# Altium PCB PCB.PcbDoc (part 2 of 2)
Units mm, origin at the board's own origin, x right, y up, seen from the top; angles counter-clockwise.
Board outline 125 x 105 mm, 2 copper layers (Top Layer, Bottom Layer), stack 1.571 mm thick; 113 components, 99 nets, 408 pads, 143 vias.
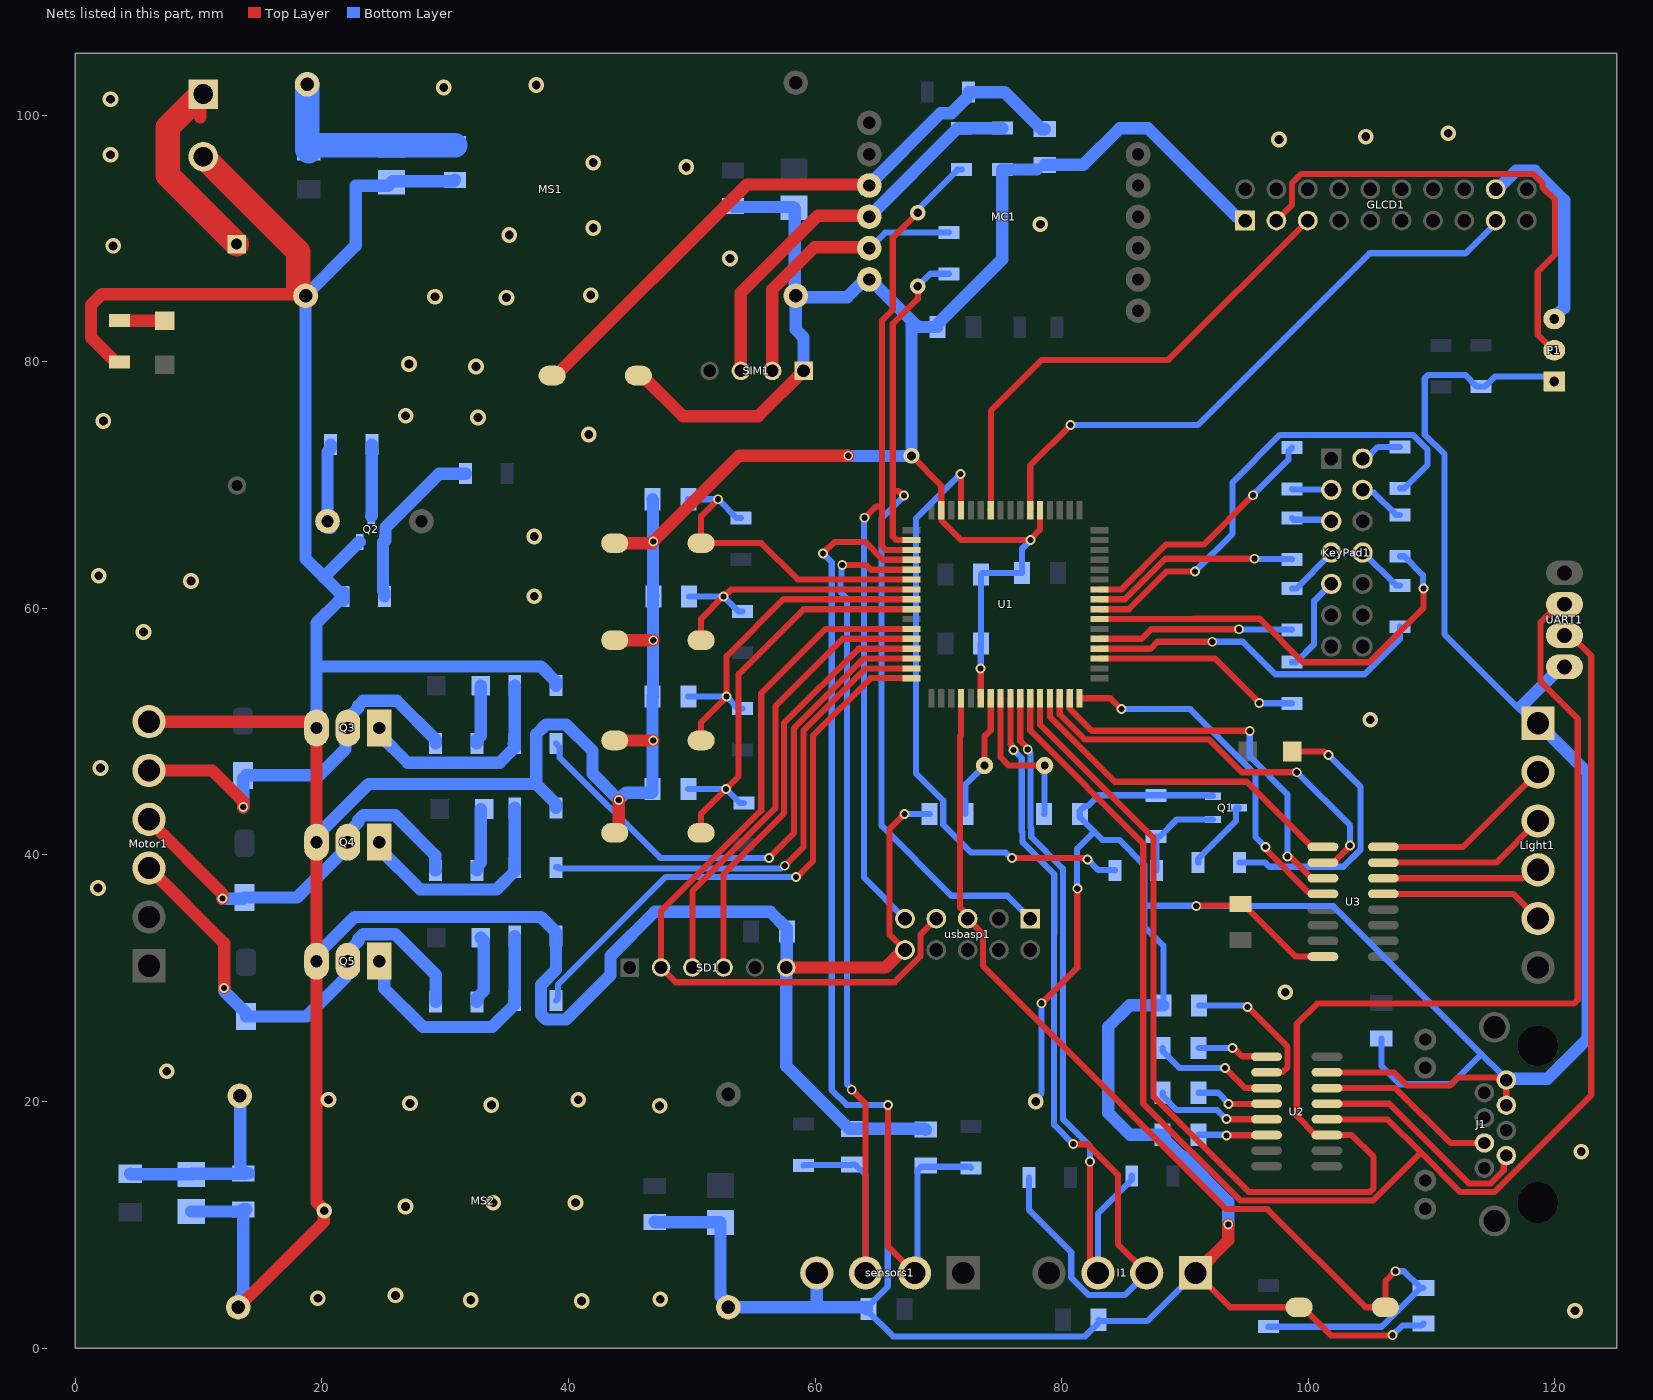
[diagram p2: the nets of this part, all layers, seen from the top]

## Via types
v1: diameter 0.8, hole 0.5, Top Layer to Bottom Layer, 76 vias
v2: diameter 1.27, hole 0.711, Top Layer to Bottom Layer, 63 vias
v3: diameter 7, hole 4, Top Layer to Bottom Layer, 4 vias

## Nets (pads, with @x,y where several pads share a name; then routed paths per layer and width w, separated by ;. In a path a pad name is that pad's centre, name@x,y a point inside that pad or via, vN(x,y) a via of type N, cw(c..) or ccw(c..) an arc to the next point about the centre after c; other vN are vias at no path point) (continued)
GND: C1.2 C2.2 C3.2 C4.2 C5.2 C6.2 C7.2 C8.2 C9.2 C10.2 C11.2 C12.2 C13.2 C14.2 C15.2 C16.2 C17.2 C18.2 C19.2 C20.2 C22.2 C24.2 C25.2 C26.2 C27.2 C28.2 C29.2 C30.1 C31.1 GLCD1.1 I1.1 J1.1 J1.3 Light1.1 MC1.6 Motor1.6 MS1.2 MS1.3 MS2.2 MS2.3 P1.1 Power1.2 Q1.2 Q2.2 Q3.3 Q4.3 Q5.3 R8.1 R9.1 R10.1 R14.1 R19.1 R20.1 R22.1 R25.2 Reset1.1 S1.2 S2.1 S3.1 S4.1 S5.1 SD1.6 sensors1.4 SIM1.1 U1.22 U1.53 U1.63 U2.15 U3.8 UART1.4 usbasp1.10 | length 870
  Top Layer w0.5: v1(67.234,43.307) 66.035,42.108 66.035,33.533 usbasp1.10@67.285,32.283 ; v2(67.818,72.353) 70.231,69.94 U1.63@70.231,67.945 70.235,67.941 70.235,67.127 71.83,65.532 v1(77.47,65.532) 77.47,65.613 78.232,66.375 U1.53@78.232,67.945 ; v1(73.406,55.118) 73.427,55.097 73.427,52.709 U1.22@73.431,52.705 ; v1@78.384,27.965 81.261,30.842 v1(81.261,37.255) ; I1.1@90.851,6.096 93.645,3.302 Reset1.1@99.243,3.302 99.543,3.302 101.829,1.016 v1@106.807,1.016 ; v1(90.907,35.839) 90.964,35.897 94.391,35.897 C31.1@94.488,35.994 ; C31.1@94.738,35.994 98.982,31.75 U3.8@101.182,31.75 ; U2.15@101.51,22.352 106.934,22.352 108.001,21.285 111.47,21.285 112.131,21.946 114.787,21.946 114.798,21.935 115.848,21.935 J1.1@116.054,21.729 J1.3@116.054,19.689
  Top Layer w1: R10.1@3.567,79.973 3.242,79.973 1.27,81.945 1.27,84.582 2.159,85.471 18.542,85.471 MS1.2@18.669,85.344 ; Motor1.6@5.969,50.8 19.096,50.8 19.558,50.338 Q3.3@19.558,50.292 Q4.3@19.558,41.021 Q5.3@19.558,31.369 19.558,11.833 20.193,11.198 v2(20.193,11.125) 20.141,11.074 20.141,10.235 MS2.2@13.208,3.302 ; S2.1@43.688,65.334 S2.1@43.744,65.278 46.736,65.278 v1(46.863,65.405) 53.823,72.365 v1(62.687,72.365) ; S5.1@43.744,41.783 43.792,41.783 44.069,42.06 v1(44.069,44.45) ; S4.1@43.744,49.276 v1(46.863,49.276) ; S3.1@43.744,57.404 v1(46.863,57.404) ; S1.2@45.664,78.867 45.964,78.867 49.266,75.565 55.372,75.565 SIM1.1@59.055,79.248 ; SD1.6@57.658,30.861 65.7,30.861 67.122,32.283 usbasp1.10@67.285,32.283 ; I1.1@90.851,6.096 93.497,8.742 v1(93.497,10.008)
  Top Layer w2: Power1.2@10.375,96.622 18.085,88.912 18.085,85.928 MS1.2@18.669,85.344
  Bottom Layer w0.5: C13.2@9.398,11.073 C13.2@9.575,11.25 ; 65.837,17.78 65.889,17.728 65.889,4.978 64.186,3.275 64.186,3.075 66.325,0.936 81.884,0.936 82.984,2.036 C5.2@82.984,2.286 83.092,2.178 86.933,2.178 I1.1@90.851,6.096 ; v1(67.234,43.307) C7.2@69.289,43.307 ; v1(73.406,55.118) 73.432,55.144 73.432,57.124 C2.2@73.459,57.15 C1.2@73.459,62.738 73.586,62.865 C3.2@76.782,62.865 76.782,64.844 v1(77.47,65.532) ; v2(77.886,19.992) 77.886,20.2 78.359,20.673 v1(78.359,27.965) ; v1@81.28,37.236 v1(81.261,37.255) 81.243,37.274 81.243,40.501 82.629,41.888 ; C6.2@81.46,43.307 81.46,43.057 82.629,41.888 ; C6.2@81.46,43.557 81.86,43.957 82.11,43.957 82.98,44.827 R8.1@87.63,44.827 91.849,44.827 91.911,44.765 Q1.2@92.261,44.765 ; C22.2@88.237,27.788 88.237,32.637 86.703,34.172 86.703,35.865 ; C24.2@105.918,25.093 105.918,22.885 107.413,21.39 111.575,21.39 114.01,23.825 114.039,23.825 ; v1@106.807,1.016 106.816,1.016 107.625,1.825 109.193,1.825 C8.2@109.347,1.979 ; J1.1@115.558,22.225 J1.1@116.054,21.729 ; J1.1@115.599,22.266 114.039,23.825 ; Light1.1@117.518,51.767 117.144,51.767 111.05,57.861 111.05,72.47 109.444,74.076 109.444,78.663 109.708,78.926 112.722,78.926 113.67,77.978 R25.2@113.995,77.978 114.32,77.978 115.133,78.791 119.532,78.791 P1.1@119.939,78.384 ; 82.629,41.888 83.303,41.214 84.643,41.214 86.703,39.154 86.703,35.865 ; 86.703,35.865 90.881,35.865 v1(90.907,35.839) 102.025,35.839 114.039,23.825
  Bottom Layer w1: C13.2@9.398,11.073 C16.2@13.614,11.073 ; MS2.2@13.208,3.302 13.399,3.493 13.399,4.173 13.614,4.388 C16.2@13.614,11.073 ; C16.2@13.614,11.25 C16.2@13.614,11.073 ; C16.2@13.847,11.25 13.67,11.073 C16.2@13.614,11.073 ; Q5.3@19.558,31.369 19.558,31.869 22.64,34.951 37.76,34.951 38.985,33.726 R22.1@38.985,33.401 38.985,30.678 37.76,29.453 37.76,27.054 38.17,26.644 39.8,26.644 43.395,30.239 43.395,31.787 46.989,35.382 56.361,35.382 57.685,34.058 57.685,30.887 SD1.6@57.658,30.861 57.658,22.864 62.742,17.78 65.837,17.78 68.887,17.78 C19.2@68.961,17.706 ; Q4.3@19.558,41.021 19.558,41.521 23.783,45.746 37.379,45.746 ; Q3.3@19.558,50.292 19.558,55.271 ; Q2.2@23.053,65.371 23.003,65.371 20.157,62.525 ; C12.2@30.785,94.74 30.683,94.638 25.73,94.638 C9.2@25.629,94.536 25.348,94.255 22.733,94.255 22.733,89.408 MS1.2@18.669,85.344 18.669,64.012 20.157,62.524 ; R20.1@38.985,43.815 38.985,44.14 37.379,45.746 ; R19.1@38.985,53.721 38.96,53.746 38.96,54.071 37.76,55.271 19.558,55.271 ; C26.2@46.81,68.834 46.847,68.797 46.847,60.997 C27.2@46.884,60.96 46.847,60.923 46.847,52.869 C28.2@46.81,52.832 C29.2@46.81,45.339 46.81,45.089 46.762,45.041 44.66,45.041 v1(44.069,44.45) 41.934,46.585 41.934,48.437 39.8,50.572 38.17,50.572 37.379,49.781 37.379,45.746 ; C15.2@46.99,10.234 47.015,10.209 52.299,10.209 C14.2@52.324,10.184 52.324,4.208 52.959,3.573 MS2.3@52.959,3.302 60.129,3.302 ; C11.2@53.34,92.604 53.402,92.542 58.231,92.542 C10.2@58.293,92.48 58.357,92.416 58.357,85.407 MS1.3@58.42,85.344 ; SIM1.1@59.055,79.248 59.055,81.968 58.42,82.603 MS1.3@58.42,85.344 ; sensors1.4@60.129,6.096 60.129,3.447 60.274,3.302 64.186,3.302 C18.2@64.186,3.152 ; v1(62.687,72.365) 62.699,72.353 v2(67.818,72.353) 67.818,83.312 ; C17.2@77.987,95.583 R14.1@75.184,95.583 75.184,88.314 69.924,83.054 C4.2@69.924,82.804 68.326,82.804 67.818,83.312 ; C17.2@78.613,95.959 81.735,95.959 84.709,98.933 86.995,98.933 94.188,91.74 94.569,91.74 GLCD1.1@94.869,91.44 ; C22.2@88.237,27.788 85.496,27.788 83.769,26.06 83.769,19.055 85.527,17.297 C25.2@88.187,17.297 88.337,17.147 88.337,16.897 89.714,15.52 89.842,15.52 93.497,11.865 v1(93.497,10.008) ; J1.1@116.054,21.729 116.164,21.839 116.57,21.839 116.575,21.844 119.394,21.844 122.657,25.107 122.657,46.628 Light1.1@118.618,50.667 117.267,52.018 120.495,55.245 UART1.4@120.777,55.245 ; 19.558,55.271 19.558,58.797 21.371,60.61 21.696,60.61 21.721,60.635 R9.1@21.721,60.96 21.721,61.285 21.696,61.31 21.371,61.31 20.157,62.524 ; MS1.3@58.42,85.344 58.547,85.217 62.594,85.217 64.118,86.741 64.389,86.741 67.818,83.312
  other v1: 106.832,1.041
  other v2: 121.625,3.025 41.056,3.812 32.064,3.888 47.431,3.965 19.669,4.041 25.968,4.269 26.772,11.481 33.884,11.786 40.564,11.786 122.133,15.928 47.381,19.636 33.741,19.713 27.137,19.84 20.533,20.144 40.777,20.144 7.401,22.456 98.12,28.854 1.838,37.315 2.042,47.043 105.013,50.955 5.521,58.067 37.221,60.962 9.382,62.207 1.889,62.639 37.221,65.814 41.64,74.094 2.27,75.186 32.649,75.466 26.781,75.618 32.496,79.606 27.061,79.809 34.96,85.194 29.169,85.27 41.793,85.397 53.096,88.369 3.058,89.385 35.189,90.274 41.996,90.833 78.267,91.137 49.54,95.786 41.996,96.141 2.854,96.776 97.622,98.021 104.658,98.249 111.338,98.529 2.854,101.272 29.88,102.237 37.373,102.44
IR_receive: C19.1 R27.1 sensors1.2 U1.4 | length 84.5
  Top Layer w0.5: v1(60.63,64.44) 61.57,65.38 64.051,65.38 65.499,63.932 U1.4@67.818,63.932 ; v1(65.913,19.71) 65.913,8.232 sensors1.2@68.049,6.096
  Bottom Layer w0.5: v1(60.63,64.44) 61.341,63.729 61.341,20.913 62.544,19.71 v1(65.913,19.71) ; sensors1.2@68.049,6.096 68.311,6.358 68.311,14.406 68.613,14.708 72.546,14.708 R27.1@72.644,14.609
IR_send: C20.1 R26.2 sensors1.3 U1.5 | length 77.5
  Top Layer w0.5: v1(62.191,63.5) 64.138,63.5 64.519,63.119 U1.5@67.818,63.119 ; v1(62.967,20.947) 64.089,19.825 sensors1.3@64.089,6.096
  Bottom Layer w0.5: R26.2@59.055,14.807 59.091,14.844 62.955,14.844 C20.1@62.992,14.88 63.242,14.88 64.089,14.033 sensors1.3@64.089,6.096 ; v1(62.191,63.5) 62.134,63.443 62.134,62.361 62.041,62.269 62.041,61.327 62.586,60.782 62.586,21.39 62.967,21.009 v1(62.967,20.947)
Light-1: U1.29 U3.1 | length 28
  Top Layer w0.5: U1.29@79.045,52.705 79.045,51.182 84.297,45.93 94.992,45.93 100.282,40.64 U3.1@101.182,40.64
Light-2: U1.30 U3.2 | length 33
  Top Layer w0.5: U1.30@79.832,52.705 79.832,51.385 81.853,49.364 91.937,49.364 94.604,46.697 v1(99.06,46.697) ; U3.2@101.182,39.37 102.031,39.37 103.378,40.717 v1(103.378,40.767)
  Bottom Layer w0.5: v1(99.06,46.697) 103.378,42.379 v1(103.378,40.767)
Light-3: U1.31 U3.3 | length 31.2
  Top Layer w0.5: U1.31@80.645,52.705 80.649,52.701 80.649,51.861 82.446,50.064 95.224,50.064 v1(95.25,50.038) ; v1(98.298,39.878) 98.355,39.821 98.561,39.821 100.282,38.1 U3.3@101.182,38.1
  Bottom Layer w0.5: v1(95.25,50.038) 95.25,47.98 98.298,44.932 v1(98.298,39.878)
Light-4: U1.32 U3.4 | length 29.4
  Top Layer w0.5: U1.32@81.432,52.705 83.947,52.705 v1(84.836,51.816) ; v1(96.52,40.64) 96.577,40.583 96.577,40.397 100.044,36.93 100.128,36.93 100.228,36.83 U3.4@101.182,36.83
  Bottom Layer w0.5: v1(84.836,51.816) 90.424,51.816 95.702,46.538 95.702,41.458 v1(96.52,40.64)
light-o-1: Light1.2 U3.16 | length 15
  Top Layer w0.5: U3.16@106.082,40.64 112.551,40.64 Light1.2@118.618,46.707
light-o-2: Light1.3 U3.15 | length 14.5
  Top Layer w0.5: U3.15@106.082,39.37 115.241,39.37 Light1.3@118.618,42.747 Light1.3@118.084,42.747
light-o-3: Light1.4 U3.14 | length 12.8
  Top Layer w0.5: U3.14@106.082,38.1 117.336,38.1 118.023,38.787 Light1.4@118.618,38.787
light-o-4: Light1.5 U3.13 | length 13.4
  Top Layer w0.5: U3.13@106.082,36.83 116.615,36.83 Light1.5@118.618,34.827
MISO: SD1.4 U1.13 | length 34.7
  Top Layer w0.5: SD1.4@52.578,30.861 52.578,38.457 57.469,43.348 57.469,50.673 63.514,56.718 U1.13@67.818,56.718
MOSI: SD1.3 U1.12 | length 37.3
  Top Layer w0.5: SD1.3@50.038,30.861 50.038,37.029 56.769,43.76 56.769,52.07 62.23,57.531 U1.12@67.818,57.531
motor_1: D3.1 Motor1.5 Q3.2 R15.1 | length 32.8
  Top Layer w1: Motor1.5@5.969,46.84 11.097,46.84 13.614,44.323 v1(13.614,43.866)
  Bottom Layer w1: v1(13.614,43.866) 13.614,46.202 13.854,46.441 19.771,46.441 21.907,48.577 21.907,50.101 Q3.2@22.098,50.292 22.098,51.063 22.938,51.903 22.938,52.082 23.348,52.492 26.069,52.492 29.214,49.347 R15.1@29.214,49.022
motor_2: D2.1 Motor1.4 Q4.2 R16.1 | length 32.3
  Top Layer w1: Motor1.4@5.969,42.88 5.969,42.799 11.938,36.83 v1(11.938,36.449)
  Bottom Layer w1: v1(11.938,36.449) 13.63,36.449 D2.1@13.716,36.535 17.976,36.535 22.098,40.657 22.098,41.792 22.938,42.632 22.938,42.811 23.348,43.221 25.928,43.221 29.189,39.96 29.189,38.76 R16.1@29.214,38.735
motor_3: D4.1 Motor1.3 Q5.2 R17.1 | length 38.2
  Top Layer w1: Motor1.3@5.969,38.92 12.065,32.824 v1(12.065,29.21)
  Bottom Layer w1: v1(12.065,29.21) 12.065,28.961 13.843,27.183 D4.1@13.843,26.883 18.755,26.883 21.907,30.035 21.907,31.178 Q5.2@22.098,31.369 22.098,32.14 22.938,32.98 22.938,33.159 23.348,33.569 25.928,33.569 29.214,30.283 R17.1@29.214,28.067
motor_con_1: R18.2 U1.14 | length 44.8
  Top Layer w0.5: v1(56.261,39.751) 58.293,41.783 58.293,50.292 63.932,55.931 U1.14@67.818,55.931
  Bottom Layer w0.5: R18.2@38.985,49.022 39.26,48.747 39.26,47.915 47.424,39.751 v1(56.261,39.751)
motor_con_2: R21.2 U1.15 | length 41.1
  Top Layer w0.5: v1(57.531,39.116) 59.042,40.627 59.042,50.051 64.109,55.118 U1.15@67.818,55.118
  Bottom Layer w0.5: R21.2@38.985,38.989 39.172,38.989 39.26,38.901 57.235,38.901 57.45,39.116 v1(57.531,39.116)
motor_con_3: R23.2 U1.16 | length 46.3
  Top Layer w0.5: v1(58.434,38.201) 58.515,38.201 59.107,38.794 59.114,38.794 59.817,39.497 59.817,49.657 64.491,54.331 U1.16@67.818,54.331
  Bottom Layer w0.5: R23.2@38.985,28.194 39.133,28.342 39.133,29.481 47.853,38.201 v1(58.434,38.201)
NetC9_1: C9.1 C12.1 F1.2 MS1.1 | length 17.5
  Bottom Layer w2: MS1.1@18.796,102.489 18.796,97.19 F1.2@18.923,97.063 19.396,97.536 C9.1@25.629,97.536 C12.1@30.785,97.536
NetC13_1: C13.1 C16.1 F3.2 MS2.1 | length 15.2
  Bottom Layer w1: F3.2@4.445,14.123 4.47,14.098 9.373,14.098 C13.1@9.398,14.073 ; C13.1@9.465,14.14 C16.1@13.735,14.14 ; 13.373,14.915 MS2.1@13.373,20.409 ; C16.1@13.697,14.3 13.818,14.179 C16.1@14.068,14.179
NetC17_1: C17.1 MC1.3 R11.1 S1.1 | length 51
  Top Layer w1: S1.1@38.664,78.867 38.964,78.867 54.458,94.361 MC1.3@64.389,94.361
  Bottom Layer w1: MC1.3@64.351,94.323 70.182,100.154 71.063,100.154 72.438,101.529 R11.1@72.438,101.854 75.368,101.854 78.363,98.859 C17.1@78.613,98.859
NetC21_1: C21.1 U2.1 | length 5.8
  Top Layer w0.5: v1(93.853,24.333) 93.934,24.333 94.61,23.657 96.575,23.657 U2.1@96.61,23.622
  Bottom Layer w0.5: C21.1@91.087,24.333 v1(93.853,24.333)
NetC21_2: C21.2 U2.3 | length 9.9
  Top Layer w0.5: v1(93.243,22.708) 94.869,21.082 U2.3@96.61,21.082
  Bottom Layer w0.5: C21.2@88.187,24.333 88.187,24.083 89.562,22.708 v1(93.243,22.708)
NetC22_1: C22.1 U2.2 | length 12.1
  Top Layer w0.5: v1(95.072,27.661) 98.31,24.423 98.31,22.77 97.93,22.39 96.648,22.39 U2.2@96.61,22.352
  Bottom Layer w0.5: C22.1@91.137,27.788 94.864,27.788 94.991,27.661 v1(95.072,27.661)
NetC23_1: C23.1 U2.4 | length 6
  Top Layer w0.5: v1(93.523,19.787) 93.535,19.799 96.597,19.799 U2.4@96.61,19.812
  Bottom Layer w0.5: C23.1@91.087,20.701 92.685,20.701 v1@93.599,19.787
NetC23_2: C23.2 U2.5 | length 9.4
  Top Layer w0.5: v1(93.37,18.567) 93.383,18.555 96.597,18.555 U2.5@96.61,18.542
  Bottom Layer w0.5: C23.2@88.187,20.701 88.187,20.451 89.341,19.296 92.591,19.296 v1@93.345,18.542
NetC25_1: C25.1 U2.6 | length 5.6
  Top Layer w0.5: v1(93.37,17.247) 93.383,17.259 96.597,17.259 U2.6@96.61,17.272
  Bottom Layer w0.5: C25.1@91.087,17.297 93.396,17.297 v1@93.421,17.272
NetD1_2: D1.2 R10.2 | length 3.7
  Top Layer w1: R10.2@3.556,83.312 R10.2@3.567,83.323 7.228,83.323 D1.2@7.239,83.334
NetD5_2: D5.2 R15.2 | length 4.8
  Bottom Layer w1: R15.2@32.564,49.022 32.564,49.347 32.884,49.667 D5.2@32.884,53.721
NetD6_2: D6.2 R16.2 | length 5.1
  Bottom Layer w1: R16.2@32.564,38.735 32.564,39.06 32.884,39.38 D6.2@32.884,43.688
NetD7_2: D7.2 R17.2 | length 5.5
  Bottom Layer w1: R17.2@32.564,28.067 32.564,28.392 33.122,28.95 33.122,33.036 D7.2@32.884,33.274
NetF2_1: F2.1 Power1.1 | length 17.7
  Top Layer w1: 10.135,99.797 10.135,101.461 Power1.1@10.375,101.702
  Top Layer w2: Power1.1@10.287,101.79 7.493,98.997 7.493,95.123 F2.1@13.081,89.535
NetGLCD1_3: GLCD1.3 P1.2 | length 39.7
  Top Layer w0.5: GLCD1.3@97.409,91.44 98.659,92.69 98.659,94.458 99.431,95.23 118.247,95.23 118.979,94.498 118.979,94.144 120.005,93.118 120.005,88.694 118.6,87.289 118.6,82.2 119.875,80.924 P1.2@119.939,80.924
NetJ1_6: J1.6 U2.14 | length 14.6
  Top Layer w0.5: U2.14@101.51,21.082 107.061,21.082 111.514,16.629 J1.6@114.274,16.629
NetJ1_7: J1.7 U2.13 | length 18.7
  Top Layer w0.5: U2.13@101.51,19.812 106.553,19.812 113.013,13.352 114.787,13.352 115.848,14.413 115.848,15.403 J1.7@116.054,15.609
NetKeyPad1_2: KeyPad1.2 R32.2 | length 3.4
  Bottom Layer w0.5: KeyPad1.2@104.394,72.136 104.705,72.136 105.646,73.077 R32.2@107.442,73.077
NetKeyPad1_3: KeyPad1.3 R33.1 | length 3.2
  Bottom Layer w0.5: R33.1@98.679,69.675 98.718,69.636 101.815,69.636 KeyPad1.3@101.854,69.596
NetKeyPad1_4: KeyPad1.4 R34.2 | length 3.9
  Bottom Layer w0.5: KeyPad1.4@104.394,69.596 104.614,69.376 105.305,69.376 107.117,67.564 R34.2@107.442,67.564
NetKeyPad1_5: KeyPad1.5 R35.1 | length 3.3
  Bottom Layer w0.5: R35.1@98.679,67.306 98.804,67.181 101.729,67.181 KeyPad1.5@101.854,67.056
NetKeyPad1_7: KeyPad1.7 R36.1 | length 4.4
  Bottom Layer w0.5: R36.1@98.679,61.591 99.004,61.591 101.854,64.441 KeyPad1.7@101.854,64.516
NetKeyPad1_8: KeyPad1.8 R37.2 | length 4.2
  Bottom Layer w0.5: KeyPad1.8@104.394,64.516 104.45,64.516 107.117,61.849 R37.2@107.442,61.849
NetKeyPad1_9: KeyPad1.9 R38.1 | length 7.9
  Bottom Layer w0.5: R38.1@98.679,55.622 99.004,55.622 100.456,57.074 100.456,60.578 KeyPad1.9@101.854,61.976
NetLS1_2: LS1.2 R5.1 | length 7
  Bottom Layer w1: LS1.2@20.705,66.527 20.447,66.785 LS1.2@20.447,67.056 20.447,72.696 20.705,72.954 R5.1@20.705,73.279
NetMC1_4: MC1.4 R12.1 R14.2 SIM1.3 | length 33.1
  Top Layer w1: SIM1.3@53.975,79.248 53.975,85.598 60.198,91.821 MC1.4@64.389,91.821
  Bottom Layer w1: MC1.4@64.389,91.821 64.449,91.821 71.557,98.929 R12.1@71.882,98.929 71.884,98.931 75.182,98.931 R14.2@75.184,98.933
NetMC1_5: MC1.5 R13.1 SIM1.2 | length 22.9
  Top Layer w1: SIM1.2@56.515,79.248 56.515,85.852 59.944,89.281 MC1.5@64.389,89.281
  Bottom Layer w0.5: MC1.5@64.389,89.281 64.482,89.281 65.673,90.472 R13.1@70.866,90.472
NetON1_2: ON1.2 R4.2 | length 22.3
  Top Layer w0.5: ON1.2@98.701,48.387 101.265,48.387 101.544,48.108 v1(101.625,48.108)
  Bottom Layer w0.5: R4.2@94.413,39.37 96.498,39.37 96.84,39.028 102.841,39.028 104.228,40.415 104.228,45.505 v1(101.625,48.108)
NetQ1_1: Q1.1 R6.1 R8.2 | length 8
  Bottom Layer w0.5: R6.1@87.678,38.735 87.678,41.429 R8.2@87.63,41.477 87.955,41.477 89.343,42.865 Q1.1@92.261,42.865
NetQ1_3: Q1.3 R4.1 | length 5.9
  Bottom Layer w0.5: R4.1@91.063,39.37 91.063,39.695 94.133,42.765 94.133,43.765 94.183,43.815 Q1.3@94.361,43.815
NetQ2_1: Q2.1 R7.1 R9.2 | length 14.1
  Bottom Layer w1: R9.2@25.071,60.96 25.071,61.285 24.953,61.403 Q2.1@24.953,65.371 25.003,65.371 25.153,65.521 25.153,66.546 29.524,70.917 R7.1@31.652,70.917
NetQ2_3: Q2.3 R5.2 | length 5.8
  Bottom Layer w1: Q2.3@24.003,67.471 24.03,67.498 24.03,73.254 R5.2@24.055,73.279
NetQ3_1: Q3.1 R18.1 R19.2 | length 18.5
  Bottom Layer w1: Q3.1@24.638,50.792 Q3.1@24.638,50.292 24.638,49.792 26.958,47.472 34.41,47.472 35.635,48.697 R18.1@35.635,49.022 ; R18.1@35.554,49.024 35.635,49.105 R19.2@35.635,53.721
NetQ4_1: Q4.1 R20.2 R21.1 | length 19.1
  Bottom Layer w1: Q4.1@24.638,41.521 Q4.1@24.638,41.021 24.638,40.521 27.974,37.185 34.156,37.185 35.635,38.664 R21.1@35.635,38.989 R20.2@35.635,43.815
NetQ5_1: Q5.1 R22.2 R23.1 | length 20.5
  Bottom Layer w1: Q5.1@24.638,31.369 25.052,30.955 25.052,29.162 28.179,26.035 33.801,26.035 35.635,27.869 R23.1@35.635,28.194 R22.2@35.635,33.401
PC0: R38.2 U1.35 | length 17.1
  Top Layer w0.5: U1.35@83.058,55.931 92.405,55.931 v1(96.012,52.324)
  Bottom Layer w0.5: v1(96.012,52.324) 96.038,52.298 98.653,52.298 R38.2@98.679,52.272
PC1: R37.1 U1.36 | length 27.9
  Top Layer w0.5: U1.36@83.058,56.718 87.198,56.718 87.757,57.277 v1(92.202,57.277)
  Bottom Layer w0.5: v1(92.202,57.277) 94.684,57.277 97.314,54.647 104.558,54.647 107.442,57.531 R37.1@107.442,58.499
PC2: R36.2 U1.37 | length 16
  Top Layer w0.5: U1.37@83.058,57.531 86.487,57.531 87.249,58.293 v1(94.361,58.293)
  Bottom Layer w0.5: v1(94.361,58.293) 94.387,58.267 98.653,58.267 R36.2@98.679,58.241
PC4: R34.1 U1.39 | length 34.7
  Top Layer w0.5: U1.39@83.058,59.131 90.668,59.131 90.68,59.143 96.04,59.143 99.562,55.621 104.922,55.621 109.347,60.046 v1(109.347,61.595)
  Bottom Layer w0.5: R34.1@107.442,64.214 107.767,64.214 109.29,62.691 109.29,61.652 v1(109.347,61.595)
PC5: R32.1 U1.40 | length 39.6
  Top Layer w0.5: U1.40@83.058,59.919 85.446,59.919 88.519,62.992 v1(90.805,62.992)
  Bottom Layer w0.5: v1(90.805,62.992) 93.852,66.039 93.852,70.21 97.695,74.052 108.478,74.052 109.652,72.879 109.652,71.612 107.767,69.727 R32.1@107.442,69.727
PC6: R35.2 U1.41 | length 17
  Top Layer w0.5: U1.41@83.058,60.731 85.115,60.731 88.392,64.008 v1(95.631,64.008)
  Bottom Layer w0.5: v1(95.631,64.008) 95.657,63.982 98.653,63.982 R35.2@98.679,63.956
PC7: R33.2 U1.42 | length 20.8
  Top Layer w0.5: U1.42@83.058,61.519 84.81,61.519 88.451,65.16 91.5,65.16 v1(95.504,69.164)
  Bottom Layer w0.5: v1(95.504,69.164) 98.383,72.043 98.383,72.75 98.404,72.75 R33.2@98.679,73.025
R/W: GLCD1.5 U1.58 | length 40.2
  Top Layer w0.5: U1.58@74.244,67.945 74.248,67.949 74.248,76.026 78.359,80.137 88.646,80.137 GLCD1.5@99.949,91.44
Reset: C8.1 R3.1 Reset1.2 U1.20 usbasp1.5 | length 86.4
  Top Layer w0.5: U1.20@71.831,52.705 71.831,49.7 71.741,49.61 71.741,35.745 72.365,35.121 usbasp1.5@72.365,34.823 73.615,33.573 73.615,30.983 93.333,11.265 96.675,11.265 104.638,3.302 Reset1.2@106.243,3.302 106.243,5.405 v1(107.061,6.223)
  Bottom Layer w0.5: R3.1@96.774,1.73 105.948,1.73 C8.1@109.097,4.879 ; v1(107.061,6.223) 107.753,6.223 C8.1@109.097,4.879 ; C8.1@109.347,4.879 C8.1@109.097,4.879
RST_glcd: GLCD1.17 U1.54 | length 49.7
  Top Layer w0.5: U1.54@77.445,67.945 77.445,71.577 v1(80.721,74.854)
  Bottom Layer w0.5: v1(80.721,74.854) 91.032,74.854 104.968,88.79 112.757,88.79 115.189,91.222 GLCD1.17@115.189,91.44
SCK: SD1.2 U1.11 usbasp1.7 | length 65.9
  Top Layer w0.5: U1.11@67.818,58.318 60.858,58.318 55.626,53.086 55.626,43.607 47.498,35.479 SD1.2@47.498,30.861 48.698,29.661 66.43,29.661 68.535,31.766 68.535,33.533 usbasp1.7@69.825,34.823
SCL: I1.2 R1.1 U1.25 | length 68.9
  Top Layer w0.5: U1.25@75.844,52.705 75.844,48.951 76.016,48.78 76.016,48.571 v1(76.073,48.514) ; v1(80.933,16.544) 80.949,16.528 82.083,16.528 84.559,14.052 84.559,8.428 I1.2@86.891,6.096
  Bottom Layer w0.5: v1(76.073,48.514) 76.76,47.827 76.76,41.931 76.826,41.865 76.826,41.004 79.395,38.436 79.395,33.547 79.375,33.527 79.375,18.102 v1(80.933,16.544) ; R1.1@77.347,13.843 77.347,11.189 80.771,7.765 80.771,5.71 82.185,4.296 85.091,4.296 I1.2@86.891,6.096
SDA: I1.3 R2.1 U1.26 | length 58.2
  Top Layer w0.5: U1.26@76.632,52.705 76.632,49.238 77.246,48.625 v1(77.246,48.544) ; v1(82.296,15.113) 82.296,7.326 82.931,6.691 I1.3@82.931,6.096
  Bottom Layer w0.5: v1(77.246,48.544) 77.246,48.462 77.46,48.248 77.46,42.221 77.526,42.154 77.526,41.447 80.095,38.879 80.095,18.584 82.296,16.383 v1(82.296,15.113) ; I1.3@82.931,6.096 82.931,10.899 85.677,13.645 R2.1@85.677,13.97
Start_LED: R6.2 U1.61 | length 49.3
  Top Layer w0.5: v1(71.794,70.895) 71.827,70.861 71.827,67.949 U1.61@71.831,67.945 ; v1(75.976,39.73) 81.905,39.73 82.012,39.624 v1(82.093,39.624)
  Bottom Layer w0.5: v1(71.794,70.895) 68.189,67.29 68.189,46.593 70.389,44.393 70.389,42.438 72.63,40.197 75.428,40.197 75.895,39.73 v1(75.976,39.73) ; v1(82.093,39.624) 82.956,38.76 84.303,38.76 R6.2@84.328,38.735
SW_1: C26.1 R28.1 S2.2 U1.6 | length 27.3
  Top Layer w0.5: v1(52.122,68.834) 50.744,67.456 S2.2@50.744,65.278 55.626,65.278 58.572,62.332 U1.6@67.818,62.332
  Bottom Layer w0.5: C26.1@49.71,68.834 v1(52.122,68.834) 53.65,67.306 R28.1@53.975,67.306
SW_2: C27.1 R29.1 S3.2 U1.7 | length 24.6
  Top Layer w0.5: S3.2@50.744,57.404 50.744,59.149 v1(52.555,60.96) 52.636,60.96 53.195,61.519 U1.7@67.818,61.519
  Bottom Layer w0.5: C27.1@49.784,60.96 v1(52.555,60.96) 53.777,59.738 R29.1@54.102,59.738
SW_3: C28.1 R30.1 S4.2 U1.8 | length 29.4
  Top Layer w0.5: S4.2@50.744,49.276 50.744,50.767 v1(52.809,52.832) 52.809,56.111 57.429,60.731 U1.8@67.818,60.731
  Bottom Layer w0.5: C28.1@49.71,52.832 v1(52.809,52.832) 53.777,51.864 R30.1@54.102,51.864
SW_4: C29.1 R31.1 S5.2 U1.9 | length 35.3
  Top Layer w0.5: S5.2@50.744,41.783 50.744,43.326 53.783,46.365 53.783,54.646 59.056,59.919 U1.9@67.818,59.919
  Bottom Layer w0.5: C29.1@49.71,45.339 v1(52.757,45.339) 53.904,44.192 R31.1@54.229,44.192
uRX: R13.2 U1.2 usbasp1.1 | length 69.5
  Top Layer w0.5: v1(67.208,69.139) 67.127,69.139 66.746,69.52 66.294,69.52 ; U1.2@67.818,65.532 66.59,65.532 66.294,65.828 66.294,69.52 ; v2(68.326,86.106) 68.326,85.09 66.294,83.058 66.294,69.52
  Bottom Layer w0.5: v1(67.208,69.139) 65.38,67.31 65.38,42.342 71.044,36.678 75.59,36.678 usbasp1.1@77.445,34.823 ; v2(68.326,86.106) 69.342,87.122 R13.2@70.866,87.122
uRX_1: U1.27 U2.12 UART1.3 | length 129.7
  Top Layer w0.5: U1.27@77.445,52.705 77.445,50.087 86.614,40.917 86.614,19.812 94.461,11.965 105.28,11.965 109.093,15.778 109.093,15.864 ; U2.12@101.51,18.542 106.415,18.542 109.136,15.821 112.305,12.652 115.076,12.652 122.936,20.511 122.936,56.126 121.277,57.785 UART1.3@120.777,57.785
uTX: R12.2 U1.3 usbasp1.9 | length 71.6
  Top Layer w0.5: v1(64.008,67.335) 64.922,68.25 65.43,68.25 ; U1.3@67.818,64.719 65.723,64.719 65.43,65.012 65.43,68.25 ; v2(68.326,92.075) 66.294,90.043 66.294,84.201 65.43,83.337 65.43,68.25
  Bottom Layer w0.5: v1(64.008,67.335) 63.969,67.296 63.969,38.139 usbasp1.9@67.285,34.823 ; v2(68.326,92.075) 68.473,92.222 68.473,92.495 71.557,95.579 R12.2@71.882,95.579
uTX_1: U1.28 U2.11 UART1.2 | length 132.9
  Top Layer w0.5: U1.28@78.232,52.705 78.236,52.701 78.236,50.542 87.441,41.337 87.441,20.382 95.158,12.665 104.99,12.665 105.283,12.958 105.283,15.499 103.51,17.272 U2.11@101.51,17.272 100.61,17.272 99.06,18.822 99.06,26.289 100.711,27.94 121.551,27.94 121.844,28.233 121.844,51.029 118.827,54.045 118.827,58.875 120.277,60.325 UART1.2@120.777,60.325
Vout: GLCD1.18 P1.3 | length 17.1
  Bottom Layer w1: GLCD1.18@115.189,93.98 115.351,93.98 116.851,95.48 118.35,95.48 120.752,93.079 120.752,84.376 119.939,83.563 P1.3@119.939,83.464
Xtal1: C6.1 U1.24 Y1.2 | length 12.6
  Top Layer w0.5: U1.24@75.032,52.705 75.032,47.904 75.692,47.244 Y1.2@78.613,47.244
  Bottom Layer w0.5: C6.1@78.56,43.307 78.587,43.333 78.587,47.218 Y1.2@78.613,47.244
Xtal2: C7.1 U1.23 Y1.1 | length 10.2
  Top Layer w0.5: Y1.1@73.733,47.244 73.733,49.597 74.244,50.108 U1.23@74.244,52.705
  Bottom Layer w0.5: C7.1@72.189,43.307 72.189,45.7 Y1.1@73.733,47.244
pads on no net: J1.2 J1.4 J1.5 J1.8 J1.9 J1.10 J1.11 J1.12 J1.13 J1.14 J1.15 J1.16 KeyPad1.1 KeyPad1.6 KeyPad1.10 KeyPad1.11 KeyPad1.12 KeyPad1.13 KeyPad1.14 MC1.1 MC1.7 MC1.8 MC1.9 MC1.10 MC1.11 MC1.12 Motor1.2 U1.1 U1.17 U1.18 U1.19 U1.33 U1.34 U1.38 U1.43 U2.7 U2.8 U2.9 U2.10 U3.5 U3.6 U3.7 U3.10 U3.11 U3.12 usbasp1.3 usbasp1.4 usbasp1.6 usbasp1.8
copper on no net:
  other v1: 79.604,41.402
  other v3: 7,4 115,4 7,70.5 115,70.5

## Polygon pours and split planes (outlines as drawn)
GND on Top Layer "GND_L01_P012" (solid, pour order 12): 124.866,0.152 0.152,0.152 0.152,104.851 124.866,104.851 124.866,104.8
NetF2_1 on Top Layer "NETF2_1_L01_P011" (solid, pour order 11): 10.338,87.655 15.85,87.655 15.85,88.595 13.081,91.364 10.49,91.364 9.601,90.475 9.601,88.392
NetF2_1 on Top Layer "NETF2_1_L01_P007" (solid, pour order 7): 12.268,100.406 9.296,100.406 9.296,99.238 9.957,98.577 12.268,98.577
NetF2_1 on Top Layer "NETF2_1_L01_P006" (solid, pour order 6): 9.779,100.101 10.033,100.355 10.033,100.244 10.175,100.102 10.391,100.317 10.401,100.317 10.401,100.063 10.135,99.797 9.754,99.797 9.754,100.051 9.779,100.076
NetF2_1 on Top Layer "NETF2_1_L01_P005" (solid, pour order 5): 5.232,97.587 5.232,92.913 9.627,88.519 9.627,88.443 13.589,88.443 14.173,89.027 14.173,90.246 8.636,95.783 8.636,97.638 9.754,98.755 9.754,99.111 11.677,99.111 12.007,99.441 11.582,99.865 11.582,100.076 10.643,100.076 10.16,100.559 9.906,100.305 7.95,100.305
NetF2_1 on Top Layer "NETF2_1_L01_P004" (solid, pour order 4): 12.268,99.441 11.405,98.577 9.093,98.577 7.798,97.282 5.537,97.282 5.232,97.587 5.232,99.441
NetF2_1 on Top Layer "NETF2_1_L01_P003" (solid, pour order 3): 12.319,104.115 12.268,104.064 12.268,99.441 10.008,99.441 8.738,98.171 7.315,98.171 6.426,97.282 5.232,98.476 5.232,101.93 5.055,102.108 5.283,102.337 5.283,104.165 12.243,104.165 12.294,104.115
+12 on Top Layer "+12_L01_P000" (solid, pour order 0): 20.32,91.567 22.581,89.306 22.581,88.367 24.155,88.367 26.035,90.246 26.035,91.567
GND on Bottom Layer "GND_L02_P013" (solid, pour order 13): 124.79,104.8 124.79,0.203 0.203,0.203 0.203,104.8
+12 on Bottom Layer "+12_L02_P001" (solid, pour order 1): 17.551,89.865 17.551,94.158 21.438,94.158 21.387,89.865 20.523,89.865 20.396,89.865

## Silkscreen, mask and mechanical layers (free items; w line width, h text height)
Top Overlay:
  text "V+" at 15.088,101.067 h2 r90
  text "V-" at 15.164,95.225 h2 r90
  text "RX" at 55.118,74.422 h1.52 r90
  text "Tx" at 57.785,74.295 h1.52 r90
  text "4+" at 52.451,74.168 h1.52 r90
  text "GND" at 60.452,72.898 h1.52 r90
  text "5+" at 113.157,62.23 h2
  text "uTX" at 112.395,59.563 h1.52
  text "uRX" at 112.395,56.769 h1.52
  text "GND" at 111.252,53.975 h2
  text "GND" at 4.445,53.594 h2
  text "GND" at 106.35,49.809 h2
  text "1" at 111.43,46.126 h2
  text "2" at 110.973,41.885 h2
  text "SCK" at 70.383,38.938 h1.52 r90
  text "RST" at 73.025,38.862 h1.52 r90
  text "uTX" at 67.716,38.811 h1.52 r90
  text "uRX" at 77.978,38.608 h1.52 r90
  text "3" at 110.744,37.567 h2
  text "4" at 110.744,33.63 h2
  text "+12" at 106.477,29.693 h2
  text "12+" at 4.445,26.416 h2
  text "MI" at 51.308,26.162 h2 r90
  text "+5" at 78.562,25.959 h1.52 r90
  text "5+" at 48.641,25.781 h2 r90
  text "MO" at 54.102,25.527 h2 r90
  text "CS" at 59.436,25.4 h2 r90
  text "GND" at 68.199,24.105 h1.52 r90
  text "GND" at 45.974,23.622 h2 r90
  text "SCK" at 56.642,23.622 h2 r90
  text "GND" at 62.357,13.462 h2 r90
  text "5+" at 74.803,13.462 h2 r90
  text "5+" at 79.502,12.065 h2 r90
  text "GND" at 91.948,12.065 h2 r90
  text "SDA" at 83.312,11.938 h1.52 r90
  text "SCL" at 87.503,11.811 h1.52 r90
Mechanical 1:
  the board outline again, w0.254

## Text inside footprints (layer, text, board x,y; h text height)
GLCD1: Top Overlay "19" at 118.989,90.97 h1.02; Top Overlay "20" at 118.989,93.51 h1.02; Top Overlay "1" at 93.309,90.91 h1.02; Top Overlay "2" at 93.009,93.45 h1.02
KeyPad1: Top Overlay "1" at 101.324,74.266 h1 r270; Top Overlay "2" at 104.024,74.566 h1 r270; Top Overlay "13" at 101.324,55.166 h1 r270; Top Overlay "14" at 104.024,55.166 h1 r270
P1: Top Overlay "CW" at 118.72,83.541 h1 r90
SD1: Top Overlay "1" at 42.291,30.353 h1
SIM1: Top Overlay "1" at 59.055,81.407 h1
usbasp1: Top Overlay "1" at 79.005,35.353 h1.02 r180; Top Overlay "2" at 79.305,32.813 h1.02 r180; Top Overlay "10" at 66.025,32.753 h1.02 r180; Top Overlay "9" at 66.025,35.293 h1.02 r180